# EAGLE board lcd-i2c (EAGLE 6.1)
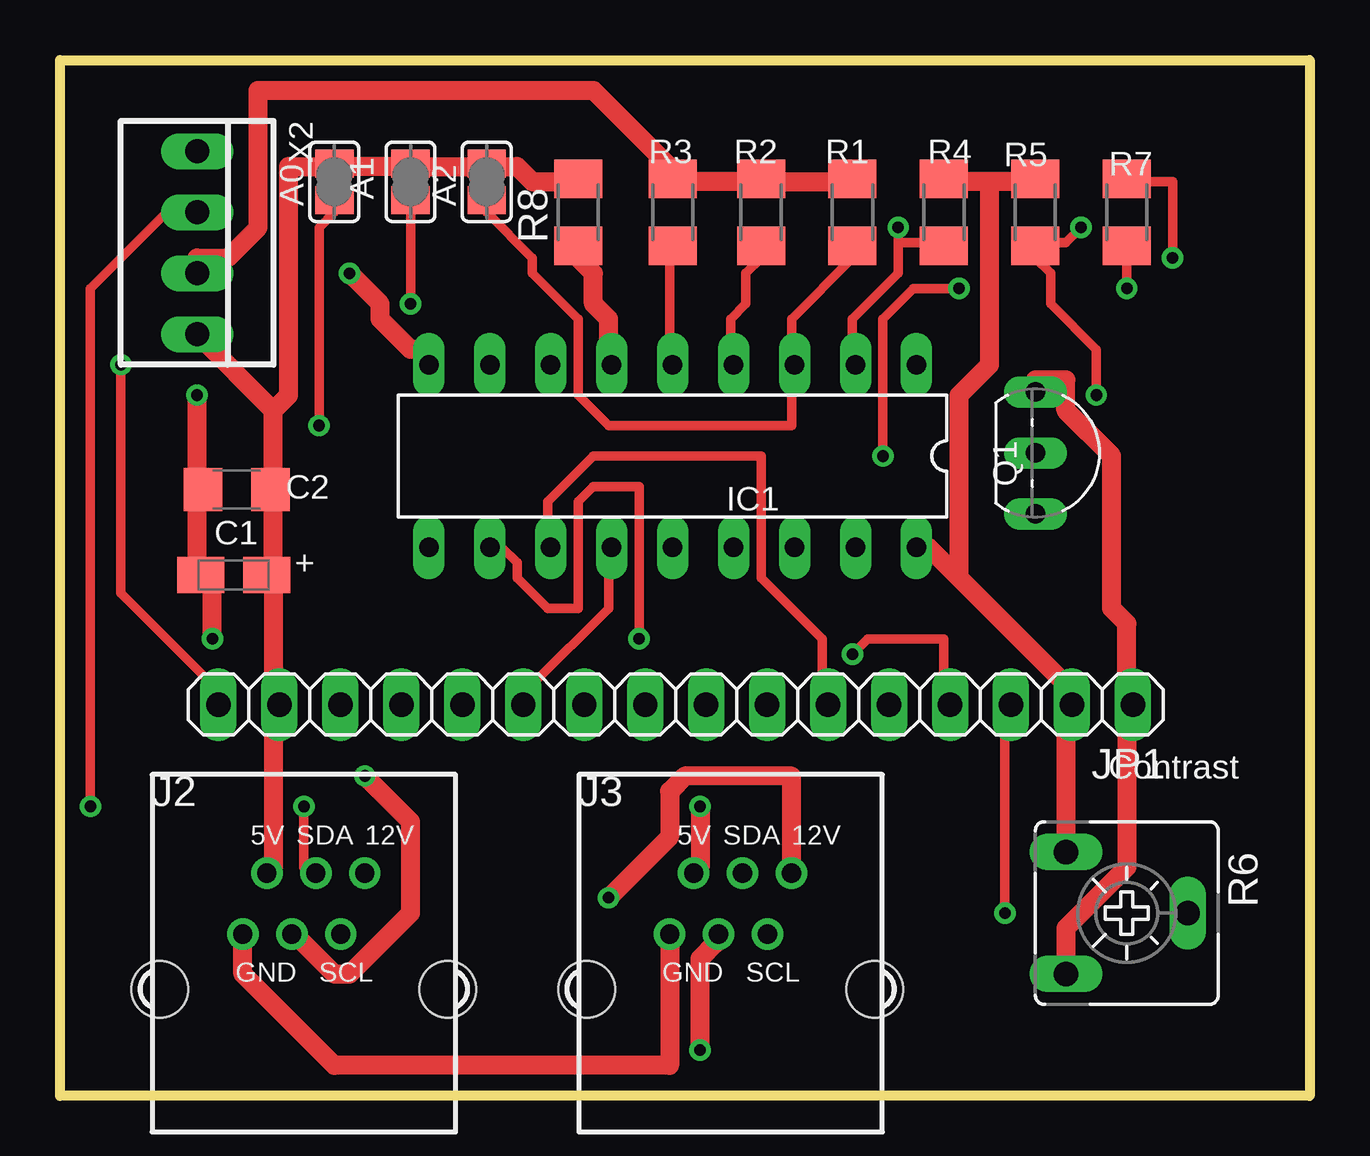
[diagram p0: board, top side]
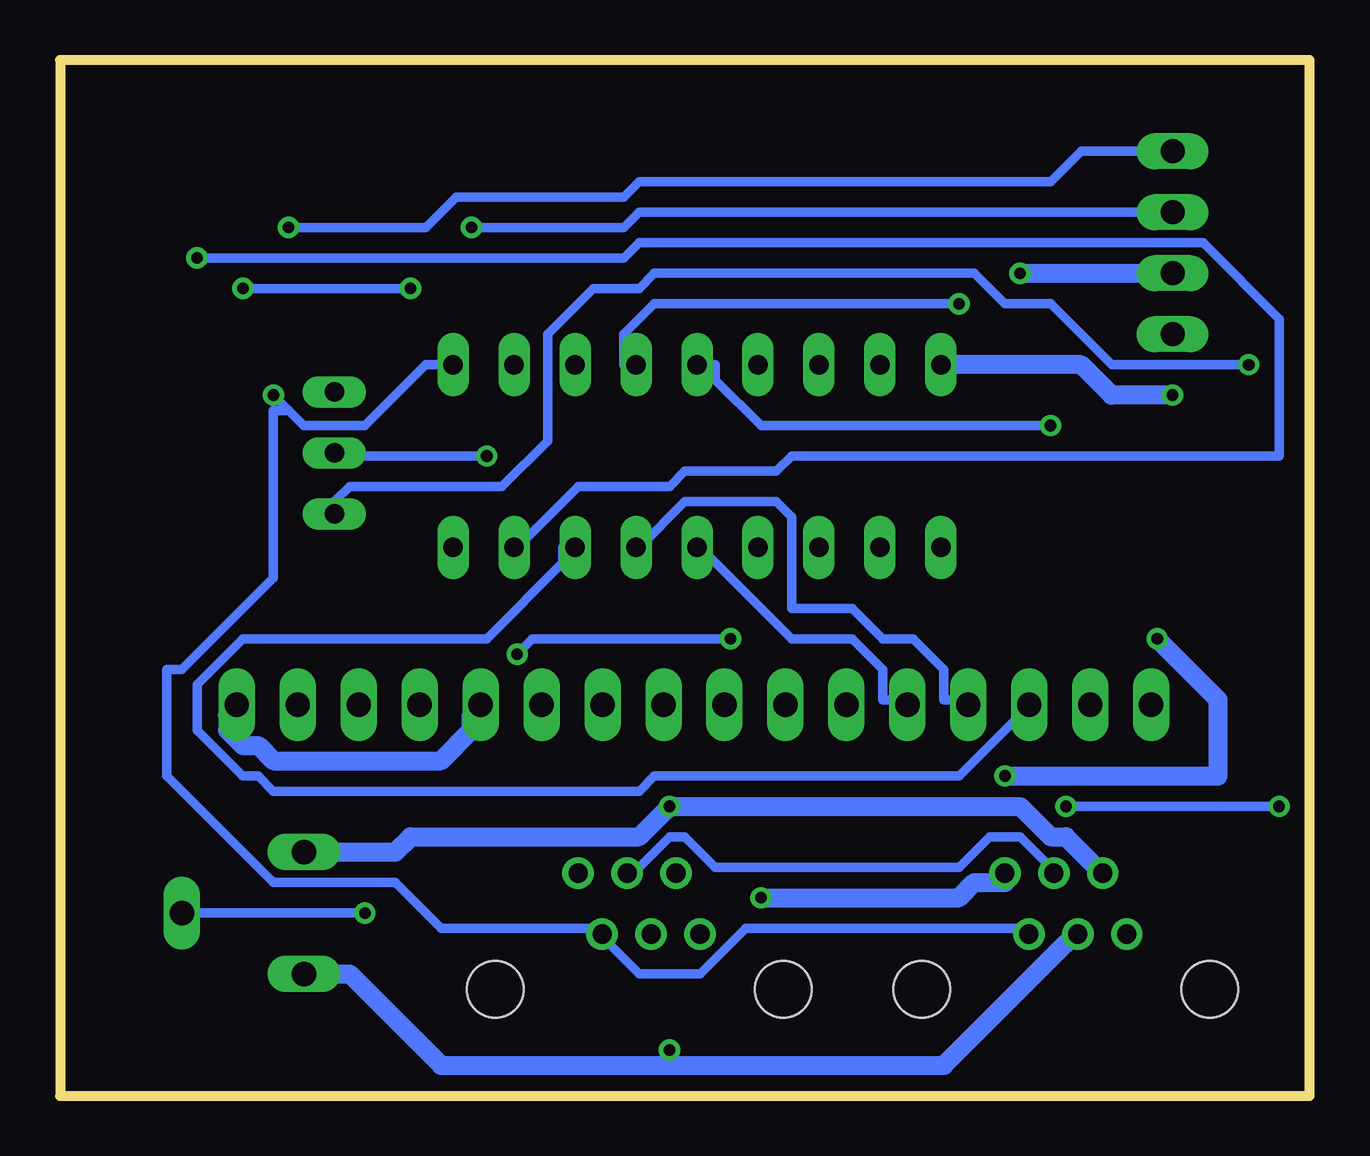
[diagram p1: board, bottom side, seen from below]

Size 52.07 x 43.18 mm. Coordinates in mm from the lower left corner, seen from the top.
Outline: 0,0 0,43.18 52.07,43.18 52.07,0 0,0
Copper layers (1*16): Top 0.035mm / dielectric 1.5mm / Bottom 0.035mm
Design rules: minimum track width 10mil, minimum drill 19mil, track to track 10mil, track to pad 10mil, pad to pad 10mil, via to via 10mil, smd to smd 10mil, copper to edge 20mil, drill to drill 8mil, minimum pad ring 10mil, minimum via ring 8mil, stop-mask expansion 4mil, vias tented up to drill 20mil, thermal gap 10mil
Net classes: 0 default: width 0.4 mm; 1 power: width 0.8 mm
tRestrict: area 44.5,21.6 to 50.8,33
bRestrict: area 44.5,21.6 to 50.8,33
vRestrict: area 44.5,21.6 to 50.8,33
Milling: 4 lines

## Footprints (pad centres in the part's own frame; a part is rotated, then mirrored left to right if it is on the bottom)
SJ = smd 1.168 x 1.6: 1 -0.762,0; 2 0.762,0
A/3216-18R = smd 1.95 x 1.5: + 1.375,0; - -1.375,0
C1206 = smd 1.6 x 1.8: 1 -1.4,0; 2 1.4,0
DIL18 = drill 0.813 long: 1 -10.16,-3.81; 2 -7.62,-3.81; 3 -5.08,-3.81; 4 -2.54,-3.81; 5 0,-3.81; 6 2.54,-3.81; 7 5.08,-3.81; 8 7.62,-3.81; 9 10.16,-3.81; 10 10.16,3.81; 11 7.62,3.81; 12 5.08,3.81; 13 2.54,3.81; 14 0,3.81; 15 -2.54,3.81; 16 -5.08,3.81; 17 -7.62,3.81; 18 -10.16,3.81
RJ12-RIGHTANGLE-I2C = drill 0.8 pad 1.3: +5V -1.54,4.84; +12V 2.54,4.84; GND1 -2.54,2.3; GND2 -0.5,2.3; SCL 1.54,2.3; SDA 0.5,4.84 | hole 2.36: -6,0; 6,0
1X16 = drill 1.016 long: 1 -19.05,0; 2 -16.51,0; 3 -13.97,0; 4 -11.43,0; 5 -8.89,0; 6 -6.35,0; 7 -3.81,0; 8 -1.27,0; 9 1.27,0; 10 3.81,0; 11 6.35,0; 12 8.89,0; 13 11.43,0; 14 13.97,0; 15 16.51,0; 16 19.05,0
TO92-EBC = drill 0.813 long: B 0,-1.27; C 2.54,-1.27; E -2.54,-1.27
M1206 = smd 1.6 x 2: 1 -1.4,0; 2 1.4,0
CA6V = drill 1.016 long: A -2.54,-2.54; E 2.54,-2.54; S 0,2.54
22-23-2041 = drill 1 long: 1 -3.81,0; 2 -1.27,0; 3 1.27,0; 4 3.81,0

## Placement (x,y rotation side)
A0  [SJ]  11.43,38.1 270 top
A1  [SJ]  14.61,38.1 270 top
A2  [SJ]  17.78,38.1 270 top
C1  10uF  [A/3216-18R]  7.24,21.72 0 top
C2  0.1uF  [C1206]  7.37,25.27 180 top
IC1  MCP2300X/P  [DIL18]  25.53,26.67 180 top
J2  RJ12RIGHTANGLE-I2C  [RJ12-RIGHTANGLE-I2C]  10.16,4.45 0 top
J3  RJ12RIGHTANGLE-I2C  [RJ12-RIGHTANGLE-I2C]  27.94,4.45 0 top
JP1  [1X16]  25.65,16.31 180 top
Q1  BC349  [TO92-EBC]  41.91,26.8 270 top
R1  10k  [M1206]  33.02,36.83 270 top
R2  10k  [M1206]  29.21,36.83 270 top
R3  10k  [M1206]  25.53,36.83 270 top
R4  10k  [M1206]  36.83,36.83 90 top
R5  10k  [M1206]  40.64,36.83 90 top
R6  10k  [CA6V]  44.45,7.62 270 top
R7  10k  [M1206]  44.45,36.83 270 top
R8  10k  [M1206]  21.59,36.83 90 top
X2  22-23-2041  [22-23-2041]  5.71,35.56 270 top

## Library data of the parts
A0 A1 A2 = jumper
C1 C2 IC1 R1-R5 R7 R8 = adafruit
J2 J3 = lpatiny
JP1 = pinhead
Q1 = transistor
R6 = pot
X2 = con-molex; MF: MOLEX; MPN: 22-23-2041; OC_FARNELL: 1462920; OC_NEWARK: 38C0355

## Nets
CLOCK: IC1.1 J2.SCL J3.SCL R5.1 X2.1
DATA: IC1.2 J2.SDA J3.SDA R4.1 X2.2
DB4: IC1.13 JP1.11
DB5: IC1.14 JP1.12
DB6: IC1.15 JP1.13
DB7: IC1.16 JP1.14
E: IC1.12 JP1.6
GND [power]: C1.- C2.2 IC1.9 J2.GND2 J3.GND2 JP1.1 JP1.5 Q1.E R1.1 R2.1 R3.1 R6.E X2.3
LITE: IC1.17 R7.1
N$1: A0.2 IC1.5 R3.2
N$2: A1.2 IC1.4 R2.2
N$3: A2.2 IC1.3 R1.2
N$4 [power]: J2.+12V J3.+12V
N$5 [power]: IC1.6 R8.1
N$7: JP1.16 Q1.C
N$9: Q1.B R7.2
N$10: JP1.3 R6.S
N$11 [power]: J2.GND1 J3.GND1
RS: IC1.11 JP1.4
VCC [power]: A0.1 A1.1 A2.1 C1.+ C2.1 IC1.18 J2.+5V J3.+5V JP1.2 JP1.15 R4.2 R5.2 R6.A R8.2 X2.4

## Tracks (layer width: path | path; a pad name or v marks a point on that pad's centre or on a via)
CLOCK  (via drill 0.48)
  Top 0.4: v43.18,29.21 43.18,31.11 41.27,33.02 41.27,34.29 40.64,34.92 R5.1 40.64,35.56 41.91,35.56 v42.55,36.2
  Bottom 0.4: J2.SCL 12.06,6.99 23.5,6.99 25.4,5.08 27.94,5.08 29.21,6.35 J3.SCL 29.84,6.99 36.2,6.99 38.1,8.89 43.18,8.89 47.62,13.34 47.62,17.78 46.99,17.78 43.18,21.59 43.18,28.57 42.55,28.57 | 42.55,28.57 41.91,27.94 39.37,27.94 36.83,30.48 IC1.1 | 42.55,28.57 v43.18,29.21 | X2.1 9.53,39.37 10.79,38.1 27.94,38.1 28.57,37.47 35.56,37.47 36.83,36.2 v42.55,36.2
DATA  (via drill 0.48)
  Top 0.4: 34.92,35.56 36.83,35.56 R4.1 | 34.92,35.56 34.92,34.29 33.02,32.38 33.02,30.48 IC1.2 | 34.92,35.56 v34.92,36.2 | v10.16,12.06 10.16,9.53 J2.SDA | v1.27,12.06 1.27,33.66 4.45,36.83 X2.2
  Bottom 0.4: J3.SDA 27.94,9.53 26.67,10.79 26.04,10.79 24.77,9.53 14.61,9.53 13.34,10.79 12.06,10.79 10.79,9.53 J2.SDA | X2.2 27.94,36.83 28.57,36.2 v34.92,36.2 | v1.27,12.06 v10.16,12.06
DB4
  Top 0.4: IC1.13 22.86,22.86 22.86,20.32 19.68,17.14 19.68,16.51 JP1.11
DB5
  Bottom 0.4: IC1.14 25.4,22.86 21.59,19.05 19.05,19.05 17.78,17.78 17.78,16.51 17.14,16.51 JP1.12
DB6
  Bottom 0.4: IC1.15 27.94,22.86 26.04,24.77 22.23,24.77 21.59,24.13 21.59,20.32 19.05,20.32 17.78,19.05 16.51,19.05 15.24,17.78 15.24,16.51 14.61,16.51 JP1.13
DB7
  Bottom 0.4: IC1.16 31.11,22.86 31.11,22.23 34.29,19.05 44.45,19.05 46.35,17.14 46.35,15.24 44.45,13.34 43.81,13.34 43.18,12.7 27.94,12.7 27.3,13.34 14.61,13.34 12.06,15.88 JP1.14
E
  Top 0.4: IC1.12 20.32,22.86 20.32,24.77 22.23,26.67 29.21,26.67 29.21,21.59 31.75,19.05 31.75,16.51 JP1.6
GND  (via drill 0.48)
  Top 0.8: 29.21,38.1 26.04,38.1 R3.1 25.4,38.73 22.23,41.91 8.26,41.91 8.26,36.2 6.99,34.92 5.71,34.92 X2.3 | 29.21,38.1 33.02,38.1 R1.1 | 29.21,38.1 R2.1 | v5.71,29.21 5.71,25.4 C2.2 5.71,24.77 5.71,22.23 C1.- 6.35,21.59 v6.35,19.05 | v12.06,34.29 13.34,33.02 13.34,32.38 14.61,31.11 15.24,31.11 15.24,30.48 IC1.9 | R6.E 41.91,6.99 44.45,9.53 44.45,15.88 JP1.1 44.45,16.51 44.45,19.68 43.81,20.32 43.81,26.67 41.91,28.57 41.91,29.84 40.64,29.84 Q1.E | v26.67,1.91 26.67,5.71 27.3,6.35 J3.GND2 | v12.7,13.34 14.61,11.43 14.61,7.62 12.06,5.08 11.43,5.08 10.16,6.35 J2.GND2
  Bottom 0.8: IC1.9 9.53,30.48 8.26,29.21 v5.71,29.21 | v12.06,34.29 X2.3 | 26.67,1.27 36.2,1.27 40.01,5.08 R6.E | 26.67,1.27 15.24,1.27 10.16,6.35 J2.GND2 | 26.67,1.27 v26.67,1.91 | JP1.5 34.92,15.88 34.92,15.24 36.2,13.97 43.18,13.97 43.81,14.61 44.45,14.61 45.09,15.24 45.09,15.88 JP1.1 | v6.35,19.05 3.81,16.51 3.81,13.34 v12.7,13.34
LITE  (via drill 0.48)
  Top 0.4: v46.35,34.92 46.35,38.1 44.45,38.1 R7.1
  Bottom 0.4: v46.35,34.92 28.57,34.92 27.94,35.56 4.45,35.56 1.27,32.38 1.27,26.67 21.59,26.67 22.23,26.04 26.04,26.04 26.67,25.4 30.48,25.4 33.02,22.86 IC1.17
N$1  (via drill 0.48)
  Top 0.4: R3.2 25.4,34.92 25.4,30.48 IC1.5 | v10.79,27.94 10.79,36.2 11.43,36.83 A0.2
  Bottom 0.4: v10.79,27.94 22.86,27.94 24.77,29.84 24.77,30.48 IC1.5
N$2  (via drill 0.48)
  Top 0.4: v14.61,33.02 A1.2 | R2.2 29.21,34.92 28.57,34.29 28.57,33.02 27.94,32.38 27.94,30.48 IC1.4
  Bottom 0.4: v14.61,33.02 27.3,33.02 28.57,31.75 28.57,30.48 IC1.4
N$3
  Top 0.4: 30.48,30.48 30.48,27.94 22.86,27.94 21.59,29.21 21.59,32.38 19.68,34.29 19.68,34.92 17.78,36.83 A2.2 | 30.48,30.48 30.48,32.38 33.02,34.92 R1.2 | 30.48,30.48 IC1.3
N$4  (via drill 0.48)
  Top 0.8: v22.86,8.26 25.4,10.79 25.4,12.7 26.04,13.34 30.48,13.34 J3.+12V
  Bottom 0.8: v22.86,8.26 14.61,8.26 13.97,8.89 12.7,8.89 J2.+12V
N$5
  Top 0.8: R8.1 21.59,34.92 22.23,34.29 22.23,33.02 22.86,32.38 22.86,30.48 IC1.6
N$7  (via drill 0.48)
  Top 0.4: v2.54,30.48 2.54,20.95 6.35,17.14 6.35,16.51 JP1.16
  Bottom 0.4: v2.54,30.48 8.26,30.48 10.79,33.02 12.7,33.02 13.97,34.29 27.3,34.29 27.94,33.66 29.84,33.66 31.75,31.75 31.75,27.3 33.66,25.4 40.01,25.4 40.64,24.77 Q1.C
N$9  (via drill 0.48)
  Top 0.4: v44.45,33.66 R7.2 | v37.47,33.66 35.56,33.66 34.29,32.38 v34.29,26.67
  Bottom 0.4: v37.47,33.66 v44.45,33.66 | v34.29,26.67 40.64,26.67 Q1.B
N$10  (via drill 0.48)
  Top 0.4: v39.37,7.62 39.37,15.88 JP1.3
  Bottom 0.4: v39.37,7.62 R6.S
N$11
  Top 0.8: J2.GND1 7.62,5.08 11.43,1.27 25.4,1.27 J3.GND1
RS  (via drill 0.48)
  Top 0.4: v24.13,19.05 24.13,25.4 22.23,25.4 21.59,24.77 21.59,20.32 20.32,20.32 19.05,21.59 19.05,22.23 18.41,22.86 IC1.11 | v33.02,18.41 33.66,19.05 36.83,19.05 36.83,16.51 JP1.4
  Bottom 0.4: v24.13,19.05 32.38,19.05 v33.02,18.41
VCC  (via drill 0.48)
  Top 0.8: 14.61,38.73 11.43,38.73 | 14.61,38.73 17.78,38.73 | 14.61,38.73 A1.1 | 17.78,38.73 19.05,38.73 19.68,38.1 21.59,38.1 R8.2 | 17.78,38.73 A2.1 | J2.+5V 8.89,9.53 8.89,15.88 JP1.15 8.89,16.51 8.89,21.59 C1.+ 8.89,22.23 8.89,24.77 C2.1 8.89,25.4 8.89,28.57 | 8.89,28.57 X2.4 | 11.43,38.73 9.53,38.73 9.53,29.21 8.89,28.57 | 11.43,38.73 A0.1 | v26.67,12.06 26.67,9.53 J3.+5V | 38.73,38.1 40.64,38.1 R5.2 | 38.73,38.1 36.83,38.1 R4.2 | 37.47,21.59 41.91,17.14 41.91,16.51 JP1.2 41.91,15.88 R6.A | 37.47,21.59 36.2,22.86 IC1.18 | 38.73,38.1 38.73,30.48 37.47,29.21 37.47,21.59
  Bottom 0.8: R6.A 38.1,10.16 37.47,10.79 27.94,10.79 v26.67,12.06 12.06,12.06 10.79,10.79 10.16,10.79 8.89,9.53 J2.+5V

## Text on the board
tPlace: Contrast